# Altium PCB PCBCompartimento.PcbDoc
Units mm, origin at the board's own origin, x right, y up, seen from the top; angles counter-clockwise.
Board outline 73.53 x 68.07 mm, 2 copper layers (Top Layer, Bottom Layer), stack 1.571 mm thick; 42 components, 21 nets, 129 pads, 200 vias.
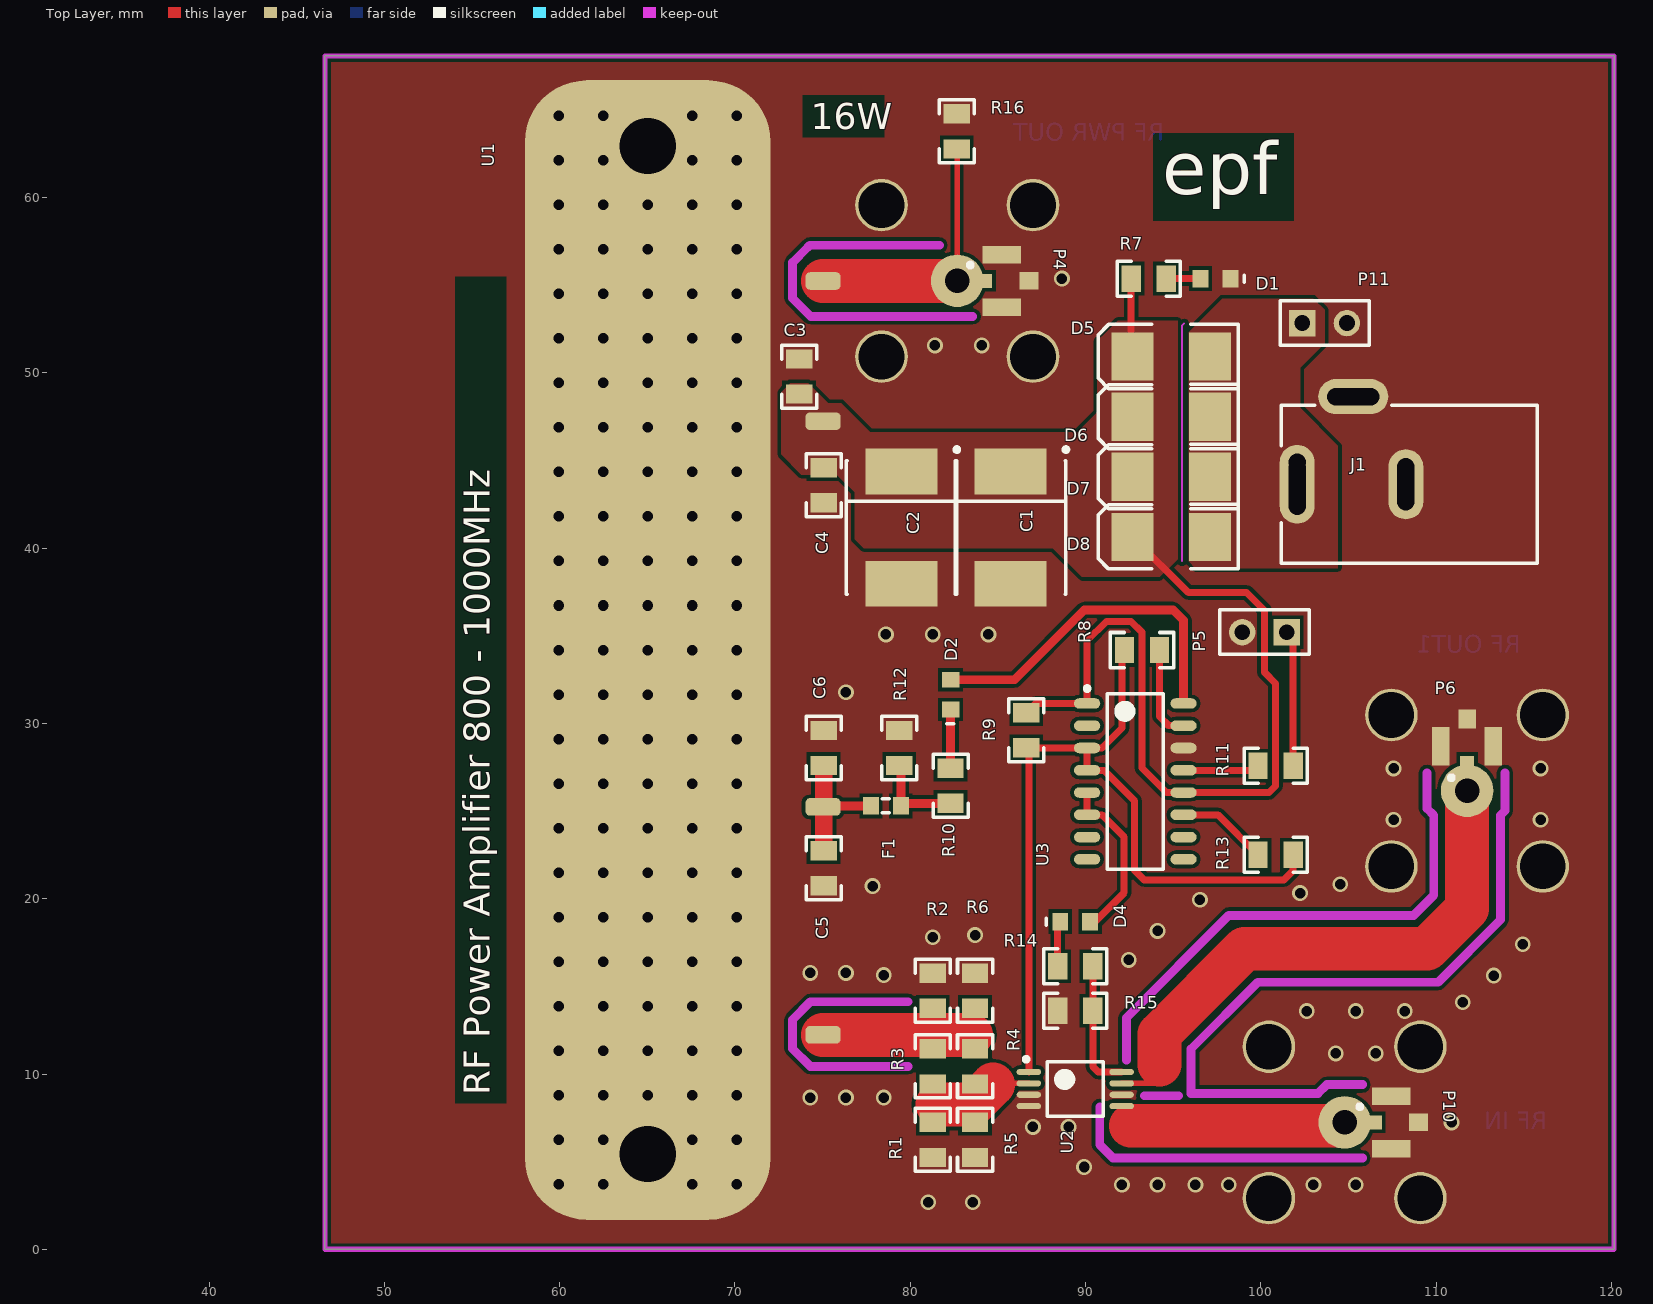
[diagram p0: Top Layer view]
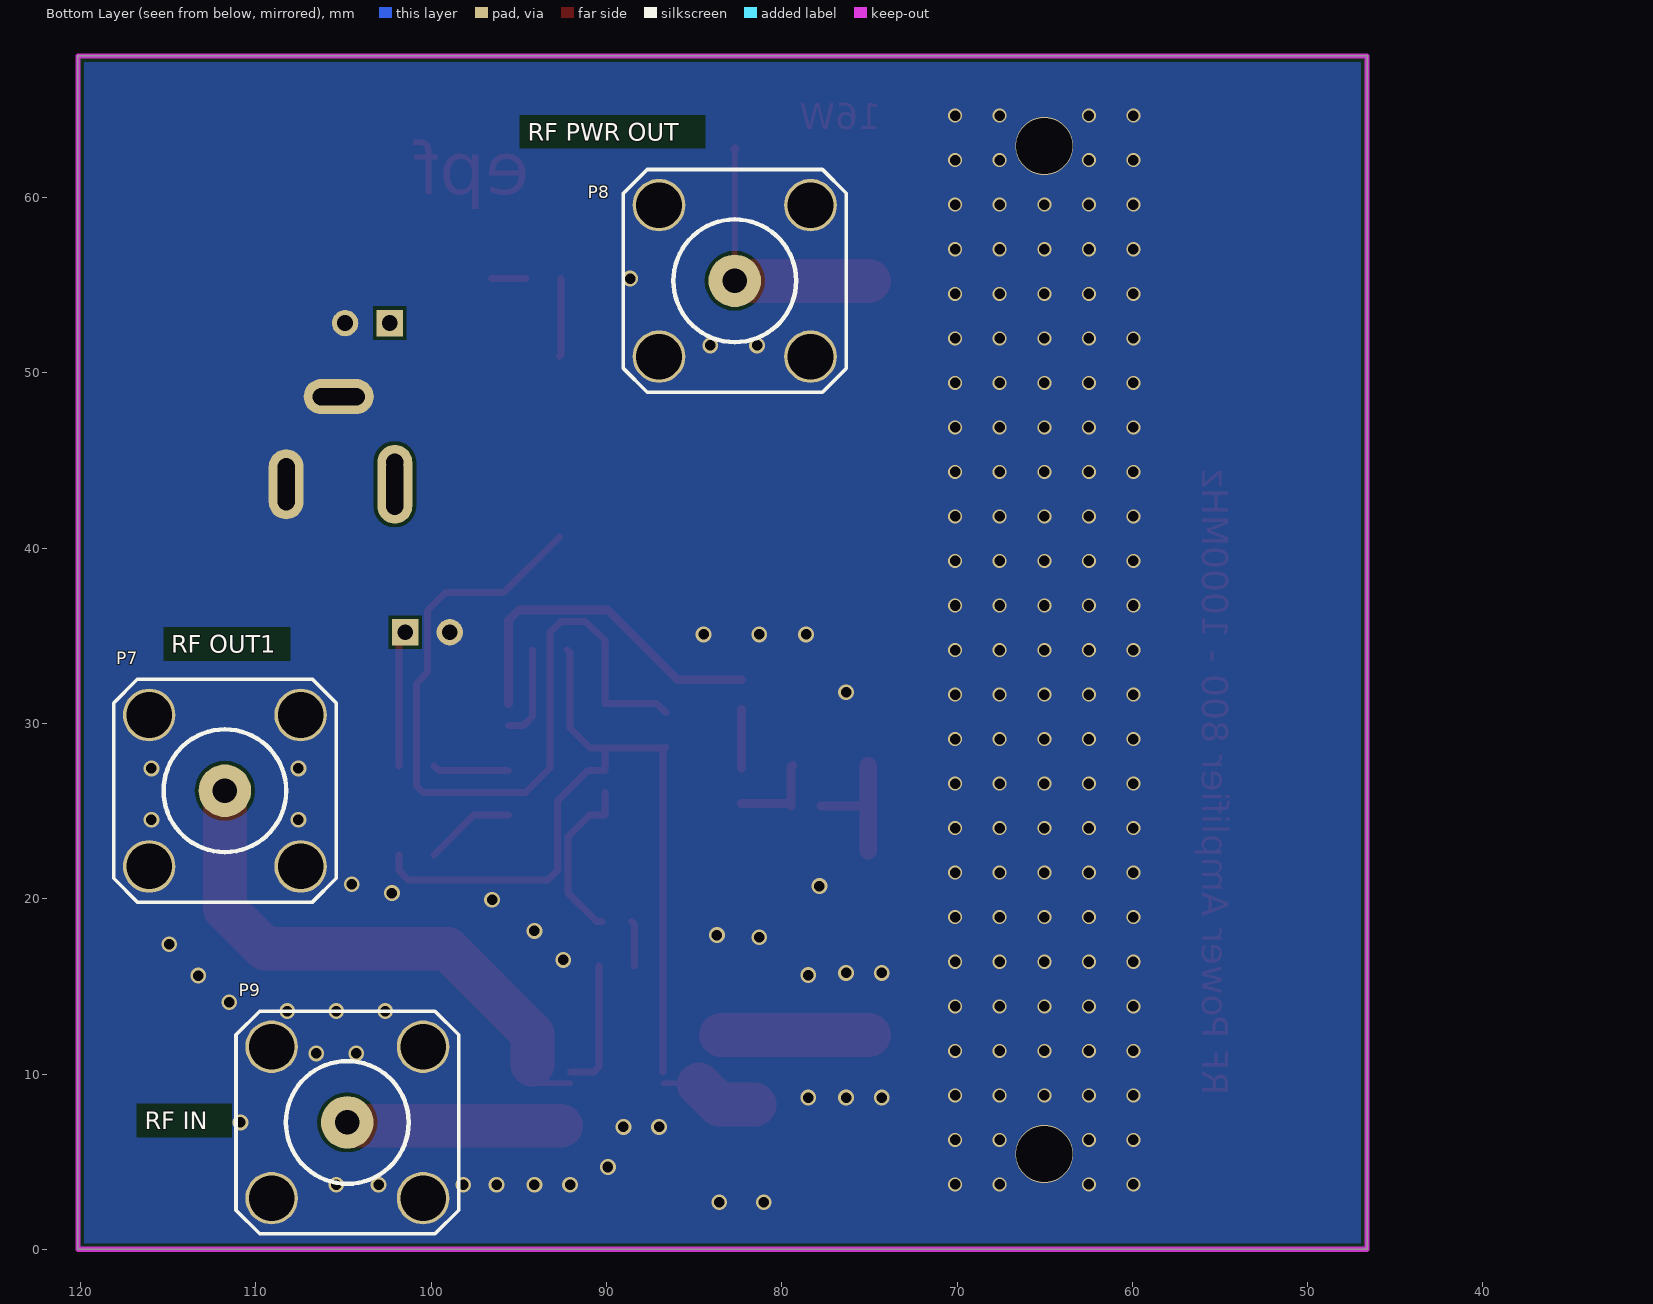
[diagram p1: Bottom Layer view, seen from below]
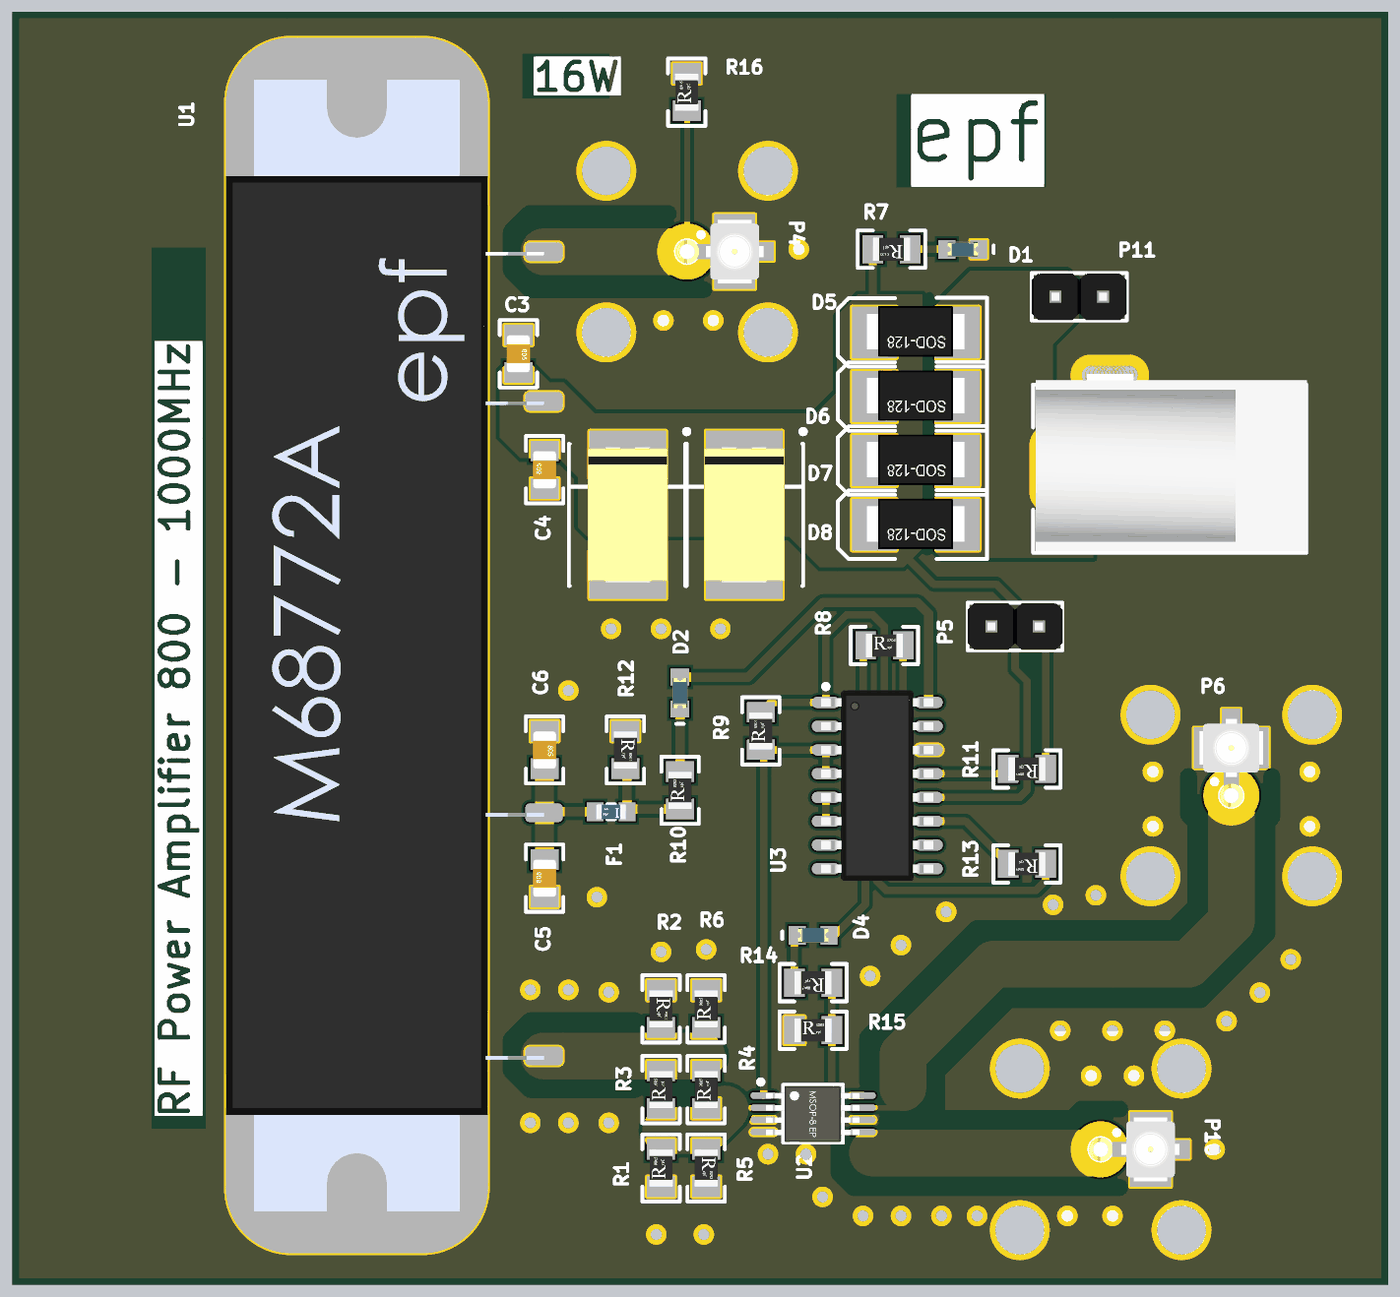
[diagram p2: 3D render of the assembled board from above, using the file's embedded part models]
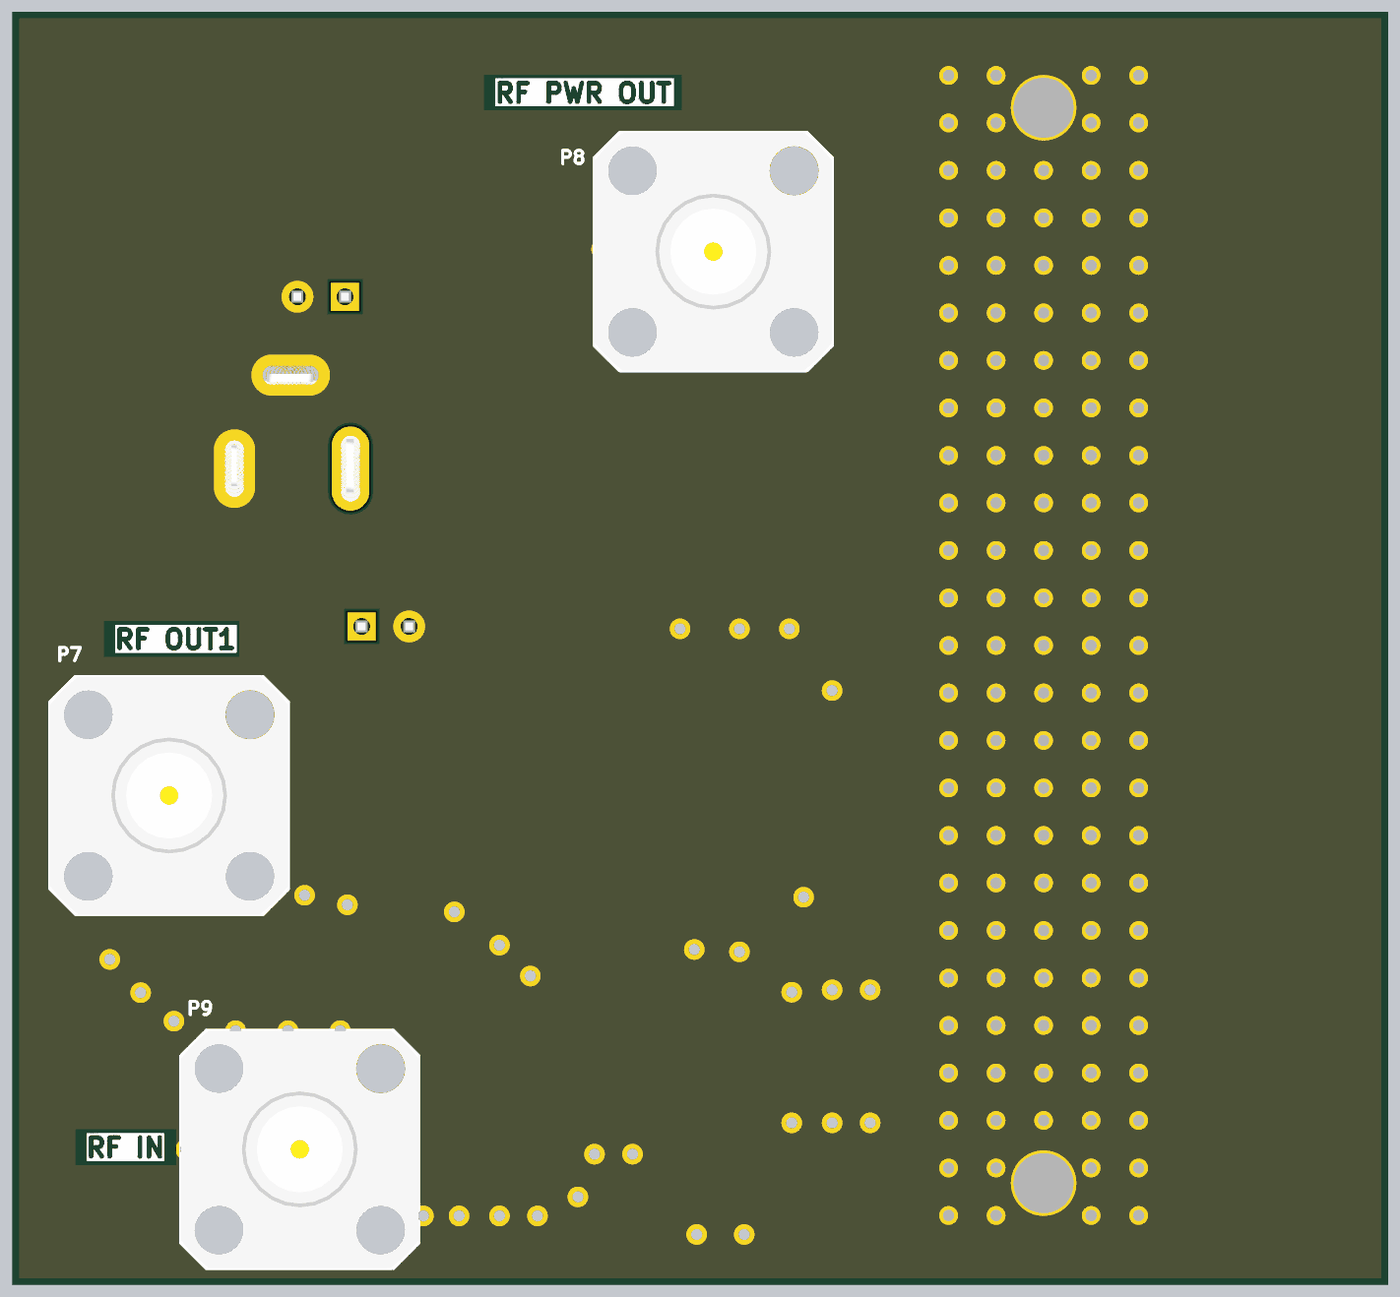
[diagram p3: 3D render of the assembled board from below, using the file's embedded part models]

## Layer stack, top to bottom
Top Layer: signal copper 0.0356
Dielectric: core 1.5, FR-4, Dk 4.8
Bottom Layer: signal copper 0.0356

## Board outline
46.609,0 46.609,68.072 120.142,68.072 120.142,0

## Design rules (kind name [scope] priority, off if disabled: settings)
Clearance [All] p1: gap=0.2
PolygonConnect [All] p1: connectstyle=Direct reliefconductorwidth=0.254 reliefentries=4 polygonreliefangle="90 Angle" airgapwidth=0.254
RoutingVias [All] p1: holewidth=0.711 width=1.27 viastyle="Through Hole" minholewidth=0.5 minwidth=0.9 maxholewidth=6 maxwidth=8
SilkscreenOverComponentPads [All] p1: minsilkscreentomaskgap=0.254
SolderMaskExpansion [All] p1: expansion=0.102
Width [All] p1: maxlimit=3 minlimit=0.254 preferedwidth=0.5
27 further rules are at their usual default settings.

## Components (designator, comment, footprint, x,y, rotation, side; value= is the part's Value field where it differs from the comment)
C1 "Cap Pol2" TC7360-2924 85.725,41.171 r270 top
C2 "Cap Pol2" TC7360-2924 79.502,41.171 r270 top
C3 "Capacitor" 0805_CAP 73.66,49.784 r270 top
C4 "Capacitor" 0805_CAP 75.057,43.584 r90 top
C5 "Capacitor" 0805_CAP 75.057,21.74 r90 top
C6 "Capacitor" 0805_CAP 75.057,28.598 r270 top
D1 "LED" LED0603 97.409,55.372 r0 top
D2 "LED" LED0603 82.296,31.646 r270 top
D4 "LED" LED0603 89.408,18.692 r180 top
D5 "MBRS130T3" MBRS130T3 94.892,50.927 r180 top
D6 "MBRS130T3" MBRS130T3 94.892,47.498 r180 top
D7 "MBRS130T3" MBRS130T3 94.892,44.069 r180 top
D8 "MBRS130T3" MBRS130T3 94.892,40.64 r180 top
F1 "Ferrita" IND0603 78.613,25.296 r180 top
J1 "PWR2.5" KLD-0202 115.767,43.641 r180 top
P4 "UFL" UFL 85.217,55.245 r270 top
P5 "Header2" HEADER2MACHO 101.473,35.202 r180 top
P6 "UFL" UFL 111.76,28.702 r0 top
P7 "SMA2" SMA-4HOLE 111.76,26.162 r180 bottom
P8 "SMA2" SMA-4HOLE 82.677,55.245 r180 bottom
P9 "SMA2" SMA-4HOLE 104.777,7.241 r180 bottom
P10 "UFL" UFL 107.442,7.239 r270 top
P11 "Header2" HEADER2MACHO 102.362,52.832 r0 top
R1 "Resistor" RES0805 81.28,6.246 r90 top
R2 "Resistor" RES0805 81.28,14.755 r270 top
R3 "Resistor" RES0805 81.28,10.437 r90 top
R4 "Resistor" RES0805 83.693,10.437 r90 top
R5 "Resistor" RES0805 83.693,6.246 r270 top
R6 "Resistor" RES0805 83.693,14.755 r90 top
R7 "Resistor" RES0805 93.599,55.372 r180 top
R8 "Resistor" RES0805 93.218,34.186 r0 top
R9 "Resistor" RES0805 86.614,29.614 r90 top
R10 "Resistor" RES0805 82.296,26.439 r90 top
R11 "Resistor" RES0805 100.838,27.582 r180 top
R12 "Resistor" RES0805 79.375,28.598 r270 top
R13 "Resistor" RES0805 100.838,22.502 r180 top
R14 "Resistor" RES0805 89.408,16.152 r180 top
R15 "Resistor" RES0805 89.408,13.612 r0 top
R16 "Resistor" RES0805 82.654,63.77 r90 top
U1 "M68772A" M68772A 65.024,34.186 r90 top
U2 "UPG137GV" SOP65P640-8L 89.408,9.144 r0 top
U3 "MMPQ6700" SOIC127P602-16BN 92.837,26.693 r0 top

## Footprints (in the part's own frame and the unit in brackets; to place one, negate y for a bottom-side part, rotate by r counter-clockwise, add the part's x,y. Pads: shape width x height; smd on the part's side, far side on the other; paste and mask are expansions set on the pad)
0805_CAP [mm]
  rect 1.1x1.5 smd: 1(-1,0) 2(1,0)
  silkscreen extent -1.8,-1 1.8,1, body extent -1,-0.62 1,0.63, height 0.78
HEADER2MACHO [mm]
  rect 1.5x1.5 hole 0.9: 1(0,0)
  round 1.5 hole 0.9: 2(2.54,0)
  silkscreen extent -1.27,-1.27 3.81,1.27, body extent -1.27,-1.25 3.81,1.25, height 8.55
IND0603 [mm] "Chip Resistor, Body 1.6x0.8mm, IPC Medium Density"
  rect 0.9x1 smd: 1(-0.85,0) 2(0.85,0)
  silkscreen extent -0.2,-0.4 0.2,0.4, body extent -0.8,-0.4 0.8,0.4, height 0.4
KLD-0202 [mm]
  oval 2x4.5 all layers, no hole: 1(13.7,0)
  round 1.5 hole 1: 1A(13.7,-1.25) 1B(13.7,1.25) 2A(7.5,-1) 2B(7.5,1) 3A(9.5,-5) 3B(11.5,-5)
  oval 2x4 all layers, no hole: 2(7.5,0)
  oval 4x2 all layers, no hole: 3(10.5,-5)
  silkscreen extent 0,-4.5 14.6,4.5, body extent -0.03,-5.05 14.45,4.42, height 11.18
LED0603 [mm]
  rect 0.9x1 smd: 1(-0.85,0) 2(0.85,0)
  silkscreen extent 1.65,-0.2 1.65,0.2, body extent -0.81,-0.4 0.81,0.4, height 0.6
M68772A [mm]
  rrect50% 1x2 smd: 1(-21.95,-10) 2(-8.95,-10) 3(13.05,-10) 4(21.05,-10)
  rrect50% 65x14 smd: 5(0,0)
  body extent -30.25,-10 30.25,7, height 6.4
MBRS130T3 [mm]
  rect 2.4x2.75 smd: 1(-2.21,0) 2(2.21,0)
  silkscreen extent -3.81,-1.85 4.16,1.83, body extent -2.6,-1.4 2.6,1.3, height 1.11
RES0805 [mm]
  rect 1.1x1.5 smd: 1(-1,0) 2(1,0)
  silkscreen extent -1.8,-1 1.8,1, body extent -1,-0.62 1,0.63, height 0.5
SMA-4HOLE [mm]
  round 3 hole 2.6: 0(-4.32,-4.32) 0(-4.32,4.32) 0(4.32,-4.32) 0(4.32,4.32)
  round 3 hole 1.4: 1(0,0)
  silkscreen extent -6.35,-6.35 6.35,6.35, body extent -6.35,-6.35 6.35,6.35, height 9.58
SOIC127P602-16BN [mm] "SOIC, 16-Leads, Body 9.9x3.9mm, Pitch 1.27mm, IPC Medium Density"
  oval 1.5x0.6 smd: 1(-2.75,4.445) 2(-2.75,3.175) 3(-2.75,1.905) 4(-2.75,0.635) 5(-2.75,-0.635) 6(-2.75,-1.905) 7(-2.75,-3.175) 8(-2.75,-4.445) 9(2.75,-4.445) 10(2.75,-3.175) 11(2.75,-1.905) 12(2.75,-0.635) 13(2.75,0.635) 14(2.75,1.905) 15(2.75,3.175) 16(2.75,4.445)
  silkscreen extent -2.87,-5 1.6,5.42, body extent -3,-5.1 3,5.1, height 1.7
SOP65P640-8L [mm] "SOP, 8-Leads, Body 3x4.4mm, Pitch 0.65mm, IPC High Density"
  oval 1.4x0.35 smd: 1(-2.648,0.975) 2(-2.648,0.325) 3(-2.648,-0.325) 4(-2.648,-0.975) 5(2.648,-0.975) 6(2.648,-0.325) 7(2.648,0.325) 8(2.648,0.975)
  silkscreen extent -2.92,-1.55 1.6,1.82, body extent -2.52,-1.52 2.48,1.48, height 1.09
TC7360-2924 [mm] "Capacitor, SM Tantalum; Body 7.3 x 6.0 mm (LxW typ)"
  rect 2.6x4.1 smd: 1(-3.2,0) 2(3.2,0)
  silkscreen extent -4.57,-3.15 3.8,3.27, body extent -3.65,-2.15 3.65,2.15, height 4.11
UFL [mm]
  rect 0.8x1.5 smd: 1(0,-1.3)
  rect 1x2.2 smd: 2(-1.5,0) 2(1.5,0)
  rect 1x1.1 smd: 2(0,1.55)
  silkscreen extent -1.02,-1.92 -0.78,-1.67, body extent -1.7,-1.55 1.7,1.55, height 1.25

## Part data
C1 C2: "Polarized Capacitor (Axial)"
C3 C4 C5 C6: library part Cap
D1 D2 D4: library part LED1
D5 D6 D7 D8: "DIODO 1A 30V"
J1: "Low Voltage Power Supply Connector"
P7 P8 P9: "BNC Elbow Connector"
R1 R2 R3 R4 R5 R6 R7 R8 R9 R10 R11 R12 R13 R14 R15 R16: library part Res
U1: "AMPLIFICADOR DE POTENCIA 915MHz"
U2: "L-Band SPDT GaAs MMIC SWITCH"
U3: "Quad NPN & PNP General Purpose Amplifier"

## Via types
v1: diameter 0.8, hole 0.6, Top Layer to Bottom Layer, 121 vias
v2: diameter 0.9, hole 0.6, Top Layer to Bottom Layer, 45 vias
v3: diameter 1.5, hole 1, Top Layer to Bottom Layer, 32 vias
v4: diameter 3.3, hole 3.2, Top Layer to Bottom Layer, 2 vias

## Nets (pads, with @x,y where several pads share a name; then routed paths per layer and width w, separated by ;. In a path a pad name is that pad's centre, name@x,y a point inside that pad or via, vN(x,y) a via of type N, cw(c..) or ccw(c..) an arc to the next point about the centre after c; other vN are vias at no path point)
CNT1: R14.1 R15.2 U2.8 | length 7.5
  Top Layer w0.4: R14.1 R15.2 90.408,10.43 90.719,10.119 U2.8
CNT2: R8.1 R9.1 R13.1 U2.1 U3.3 U3.4 | length 48
  Top Layer w0.4: R9.1 R9.1@86.63,28.598 ; U2.1 86.76,28.468 R9.1@86.63,28.598 ; R8.1 92.075,34.043 92.075,29.741 90.932,28.598 U3.3 ; R13.1 101.838,21.597 101.323,21.082 93.333,21.082 92.802,21.613 92.802,25.585 91.059,27.328 U3.4 U3.3 ; R9.1@86.63,28.598 U3.3
CONTROL: P5.1 R11.1 | length 7.8
  Top Layer w0.4: P5.1 101.838,34.837 R11.1
GND: C1.2 C2.2 C3.1 C4.1 C5.1 C6.1 D1.2 J1.2 J1.2A J1.2B J1.3 J1.3A J1.3B P4.2 P5.2 P6.2 P7.0 P8.0 P9.0 P10.2 P11.2 R1.1 R2.1 R5.2 R6.2 R12.1 R15.1 R16.2 U1.5 U2.3 U2.4 U2.6 U3.14
  other v1: 59.944,3.706 62.484,3.706 67.564,3.706 70.104,3.706 59.944,6.246 62.484,6.246 67.564,6.246 70.104,6.246 59.944,8.786 62.484,8.786 65.024,8.786 67.564,8.786 70.104,8.786 59.944,11.326 62.484,11.326 65.024,11.326 67.564,11.326 70.104,11.326 59.944,13.866 62.484,13.866 65.024,13.866 67.564,13.866 70.104,13.866 59.944,16.406 62.484,16.406 65.024,16.406 67.564,16.406 70.104,16.406 59.944,18.946 62.484,18.946 65.024,18.946 67.564,18.946 70.104,18.946 59.944,21.486 62.484,21.486 65.024,21.486 67.564,21.486 70.104,21.486 59.944,24.026 62.484,24.026 65.024,24.026 67.564,24.026 70.104,24.026 59.944,26.566 62.484,26.566 65.024,26.566 67.564,26.566 70.104,26.566 59.944,29.106 62.484,29.106 65.024,29.106 67.564,29.106 70.104,29.106 59.944,31.646 62.484,31.646 65.024,31.646 67.564,31.646 70.104,31.646 59.944,34.186 62.484,34.186 65.024,34.186 67.564,34.186 70.104,34.186 59.944,36.726 62.484,36.726 65.024,36.726 67.564,36.726 70.104,36.726 59.944,39.266 62.484,39.266 65.024,39.266 67.564,39.266 70.104,39.266 59.944,41.806 62.484,41.806 65.024,41.806 67.564,41.806 70.104,41.806 59.944,44.346 62.484,44.346 65.024,44.346 67.564,44.346 70.104,44.346 59.944,46.886 62.484,46.886 65.024,46.886 67.564,46.886 70.104,46.886 59.944,49.426 62.484,49.426 65.024,49.426 67.564,49.426 70.104,49.426 59.944,51.966 62.484,51.966 65.024,51.966 67.564,51.966 70.104,51.966 59.944,54.506 62.484,54.506 65.024,54.506 67.564,54.506 70.104,54.506 59.944,57.046 62.484,57.046 65.024,57.046 67.564,57.046 70.104,57.046 59.944,59.586 62.484,59.586 65.024,59.586 67.564,59.586 70.104,59.586 59.944,62.126 62.484,62.126 67.564,62.126 70.104,62.126 59.944,64.666 62.484,64.666 67.564,64.666 70.104,64.666
  other v2: 81.026,2.69 83.566,2.69 92.075,3.683 94.107,3.683 96.266,3.683 98.171,3.683 102.997,3.683 105.41,3.683 89.916,4.699 86.995,6.985 89.027,6.985 110.871,7.239 74.295,8.659 76.327,8.659 78.486,8.659 104.267,11.176 106.553,11.176 102.616,13.589 105.41,13.589 108.204,13.589 111.506,14.097 113.284,15.621 78.486,15.644 74.295,15.771 76.327,15.771 92.456,16.51 114.935,17.399 81.28,17.803 83.693,17.93 94.107,18.161 96.52,19.939 102.235,20.32 77.851,20.724 104.521,20.828 107.569,24.511 115.951,24.511 107.569,27.432 115.951,27.432 76.327,31.773 78.613,35.075 81.28,35.075 84.455,35.075 81.407,51.562 84.074,51.562 88.646,55.372
  other v3: 108.267,42.641 108.267,42.841 108.267,43.041 108.267,43.241 108.267,43.441 108.267,43.641 108.267,43.841 108.267,44.041 108.267,44.241 108.267,44.441 104.267,48.641 104.467,48.641 104.667,48.641 104.867,48.641 105.067,48.641 105.267,48.641 105.467,48.641 105.667,48.641 105.867,48.641 106.067,48.641
  other v4: 65.024,5.436 65.024,62.936
NetD1_1: D1.1 R7.1 | length 2
  Top Layer w0.4: R7.1 D1.1
NetD2_1: D2.1 U3.16 | length 19.9
  Top Layer w0.5: D2.1 85.94,32.496 89.916,36.472 94.996,36.472 95.587,35.881 U3.16
NetD2_2: D2.2 R10.2 | length 3.4
  Top Layer w0.5: R10.2 D2.2
NetD4_1: D4.1 U3.5 U3.6 | length 9.7
  Top Layer w0.4: U3.5 U3.6 90.932,24.788 92.202,23.518 92.202,20.343 90.551,18.692 D4.1
NetD4_2: D4.2 R14.2 | length 2.6
  Top Layer w0.4: R14.2 88.408,18.542 D4.2
NetD5_1: D5.1 D6.1 D7.1 D8.1 J1.1 J1.1A J1.1B P11.1
  other v3: 102.067,42.391 102.067,42.591 102.067,42.791 102.067,42.991 102.067,43.191 102.067,43.391 102.067,43.591 102.067,43.791 102.067,43.991 102.067,44.191 102.067,44.391 102.067,44.591
NetF1_1: F1.1 R10.1 R12.2 | length 5.2
  Top Layer w0.5: R12.2 79.463,27.51 F1.1 79.606,25.439 R10.1
NetP1_1: P4.1 P8.1 R16.1 U1.4 | length 15.2
  Top Layer w0.3: P8.1 R16.1@82.677,62.747
  Top Layer w0.5: R16.1 R16.1@82.677,62.747
  Top Layer w2.5: U1.4 82.668,55.236 P8.1
NetP2_1: P6.1 P7.1 U2.7 | length 30.9
  Top Layer w0.3: U2.7 93.924,9.469
  Top Layer w2.5: 94.206,10.541 94.206,12.291 99.06,17.145 109.474,17.145 111.76,19.431 P7.1
NetP3_1: P9.1 P10.1 U2.5 | length 12.3
  Top Layer w2.5: 92.583,7.051 104.587,7.051 P9.1
NetR2_2: R2.2 R3.2 R4.2 R6.1 U1.1 | length 8.4
  Top Layer w2.5: U1.1 83.46,12.236
NetR8_2: R8.2 U3.15 | length 5.4
  Top Layer w0.4: R8.2 94.218,30.392 94.742,29.868 U3.15
NetR11_2: R11.2 U3.13 | length 4.4
  Top Layer w0.4: U3.13 99.584,27.328 R11.2
NetR13_2: R13.2 U3.11 | length 5.2
  Top Layer w0.4: U3.11 97.552,24.788 R13.2
OUT2: R1.2 R3.1 R4.1 R5.1 U2.2 | length 5.7
  Top Layer w0.3: 84.709,9.398 84.78,9.469 U2.2
  Top Layer w2.5: 81.534,8.255 83.566,8.255 84.709,9.398
VCC: C1.1 C2.1 C3.2 C4.2 D5.2 D6.2 D7.2 D8.2 R7.2 R9.2 U1.3 U3.1 U3.12 | length 51.2
  Top Layer w0.4: R9.2 87.138,31.138 U3.1 90.087,34.723 91.186,35.822 92.598,35.822 93.218,35.202 93.218,27.455 94.615,26.058 U3.12 100.457,26.058 100.838,26.439 100.838,32.281 100.203,32.916 100.203,36.449 99.187,37.465 95.857,37.465 D8.2 ; R7.2 92.599,51.01 D5.2
VG: C5.2 C6.2 F1.2 U1.2 | length 7.6
  Top Layer w0.5: U1.2 75.057,25.269 75.084,25.296 F1.2
  Top Layer w1: C5.2 75.057,25.269 C6.2
pads on no net: U3.2 U3.7 U3.8 U3.9 U3.10

## Polygon pours and split planes (outlines as drawn)
GND on Top Layer "TOPGND" (solid, remove dead copper, pour order 15): 0,0 120.142,0 120.142,68.072 0,68.072
VCC on Top Layer "TOPVCC" (solid, remove dead copper, pour order 12): 95.25,52.959 91.821,52.959 91.186,52.324 90.678,51.816 90.678,49.657 90.678,47.752 89.535,46.609 77.724,46.609 77.089,47.244 76.073,48.26 75.311,48.26 74.168,49.403 73.152,49.403 72.644,48.895 72.644,48.26 72.644,45.339 73.787,44.196 75.819,44.196 76.835,43.18 76.835,40.513 77.216,40.132 77.343,40.005 88.138,40.005 89.789,38.354 93.345,38.354 94.234,38.354 95.25,39.37
NetD5_1 on Top Layer "TOPVIN" (solid, remove dead copper, pour order 14): 95.885,39.243 96.266,38.862 104.394,38.862 104.394,45.847 102.235,48.006 102.235,50.292 103.632,51.689 103.632,53.594 102.997,54.229 102.616,54.229 97.917,54.229 97.79,54.229 95.885,52.324
GND on Bottom Layer "BOTTOMGND" (solid, remove dead copper, pour order 20): 0,0 120.142,0 120.142,68.072 0,68.072

## Keep-outs
Top Layer:
  lines w0.1: 95.504,39.243 95.504,52.705 95.631,52.832
  lines w0.5: 79.883,10.437 74.295,10.437 73.279,11.453 73.279,13.104 74.295,14.12 79.883,14.12 ; 81.661,57.277 74.272,57.277 74.168,57.173 73.279,56.284 73.279,54.252 74.168,53.363 74.318,53.213 83.566,53.213 ; 90.805,8.128 90.805,5.969 91.567,5.207 105.791,5.207 ; 92.329,10.795 92.329,13.208 98.171,19.05 108.712,19.05 109.855,20.193 109.855,24.765 109.474,25.146 109.474,27.178 ; 93.345,8.763 95.312,8.763 ; 105.791,9.398 103.759,9.398 103.251,8.89 96.012,8.89 96.012,11.43 99.822,15.24 110.109,15.24 113.665,18.796 113.665,24.765 113.919,25.019 113.919,27.178
Keep-Out Layer:
  the board outline again, w0.3
  text "Capa de borde de PCB" at 128.778,10.16 h1.5

## Other copper
Top Layer:
  text "16W" at 74.318,63.881 h1.5
  text "epf" at 94.361,60.175 h3
  text "RF Power Amplifier 800 - 1000MHz" at 56.007,8.786 h1.5 r90
Bottom Layer:
  text "RF PWR OUT" at 94.488,63.246 h1
  text "RF OUT1" at 114.808,34.036 h1
  text "RF IN" at 116.332,6.858 h1

## Silkscreen, mask and mechanical layers (free items; w line width, h text height)
Top Overlay:
  text "16W" at 74.318,63.881 h1.5
  text "epf" at 94.361,60.175 h3
  text "RF Power Amplifier 800 - 1000MHz" at 56.007,8.786 h1.5 r90
Bottom Overlay:
  text "RF PWR OUT" at 94.488,63.246 h1
  text "RF OUT1" at 114.808,34.036 h1
  text "RF IN" at 116.332,6.858 h1
Mechanical 3:
  text "Capa de corte interior" at 128.651,14.732 h1.5

## Text inside footprints (layer, text, board x,y; h text height)
J1: Mechanical 1 "Alert PCB fab to slot details" at 115.481,37.575 h0.3 r180; Mechanical 1 "Assign keep-out area to slot" at 115.481,37.075 h0.3 r180; Mechanical 1 "Mech 1 - Slot cut-out" at 115.481,38.075 h0.3 r180; Mechanical 1 "Mech 2 - Clearance, move to internal plane if present" at 115.481,38.575 h0.3 r180